# Altium PCB KC_Input_VAS_v0.21.PcbDoc
Units mil, origin at the board's own origin, x right, y up, seen from the top; angles counter-clockwise.
Board outline 3260 x 1710 mil, 2 copper layers (Top Layer, Bottom Layer); 49 components, 32 nets, 108 pads, 0 vias.
Unrouted connection lines stored in the file: 1.
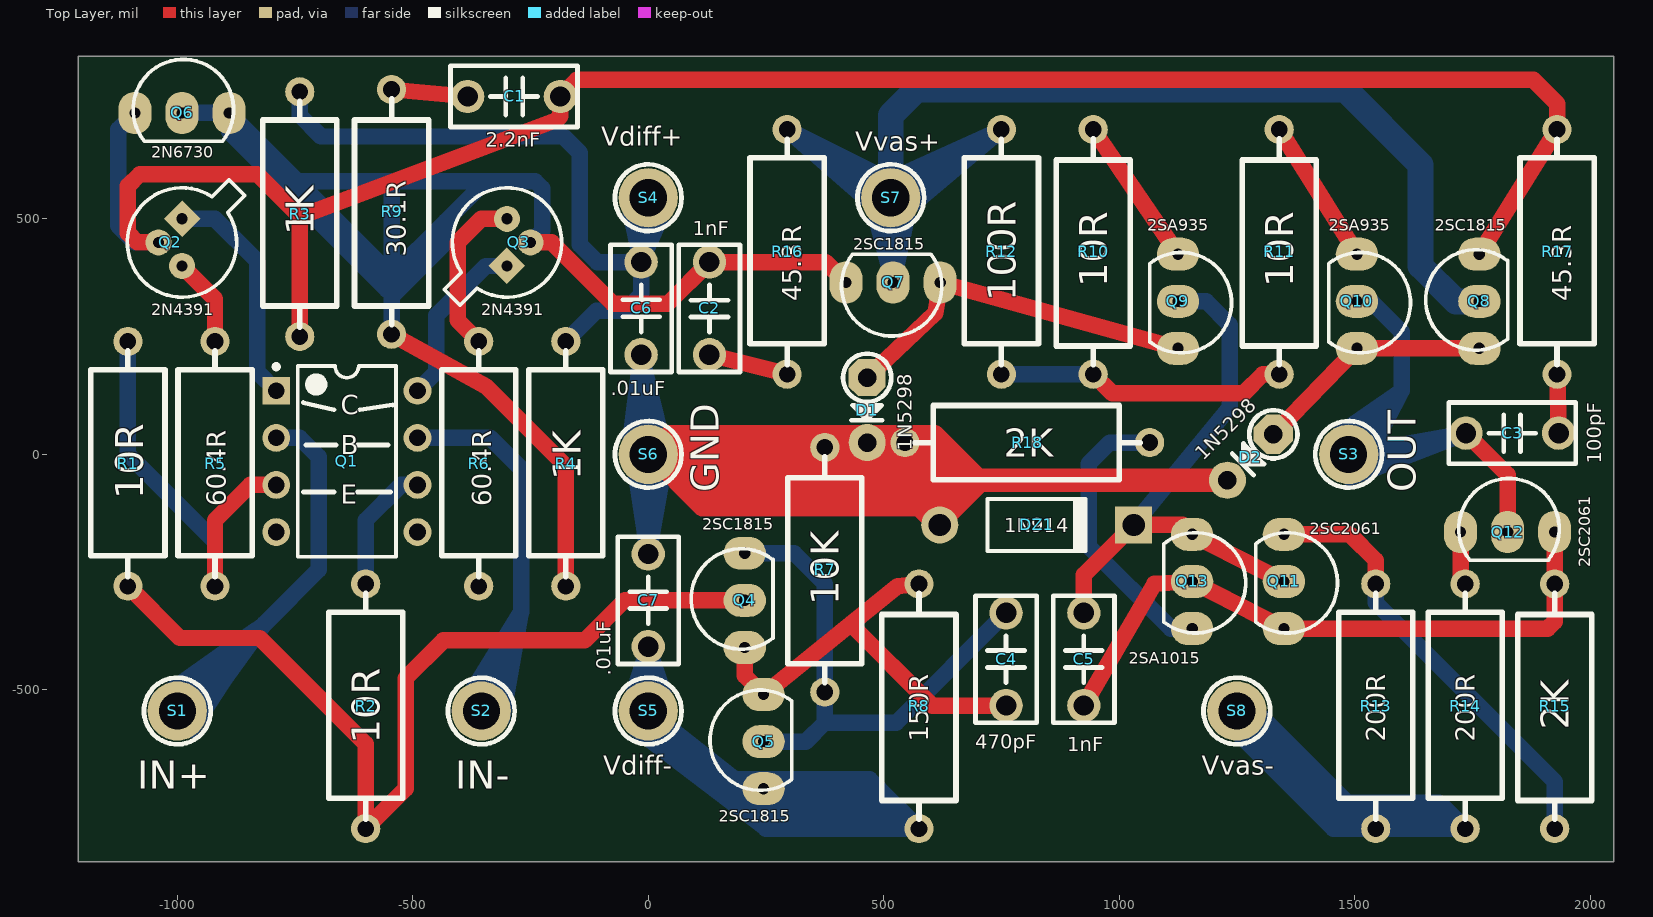
[diagram p0: Top Layer view]
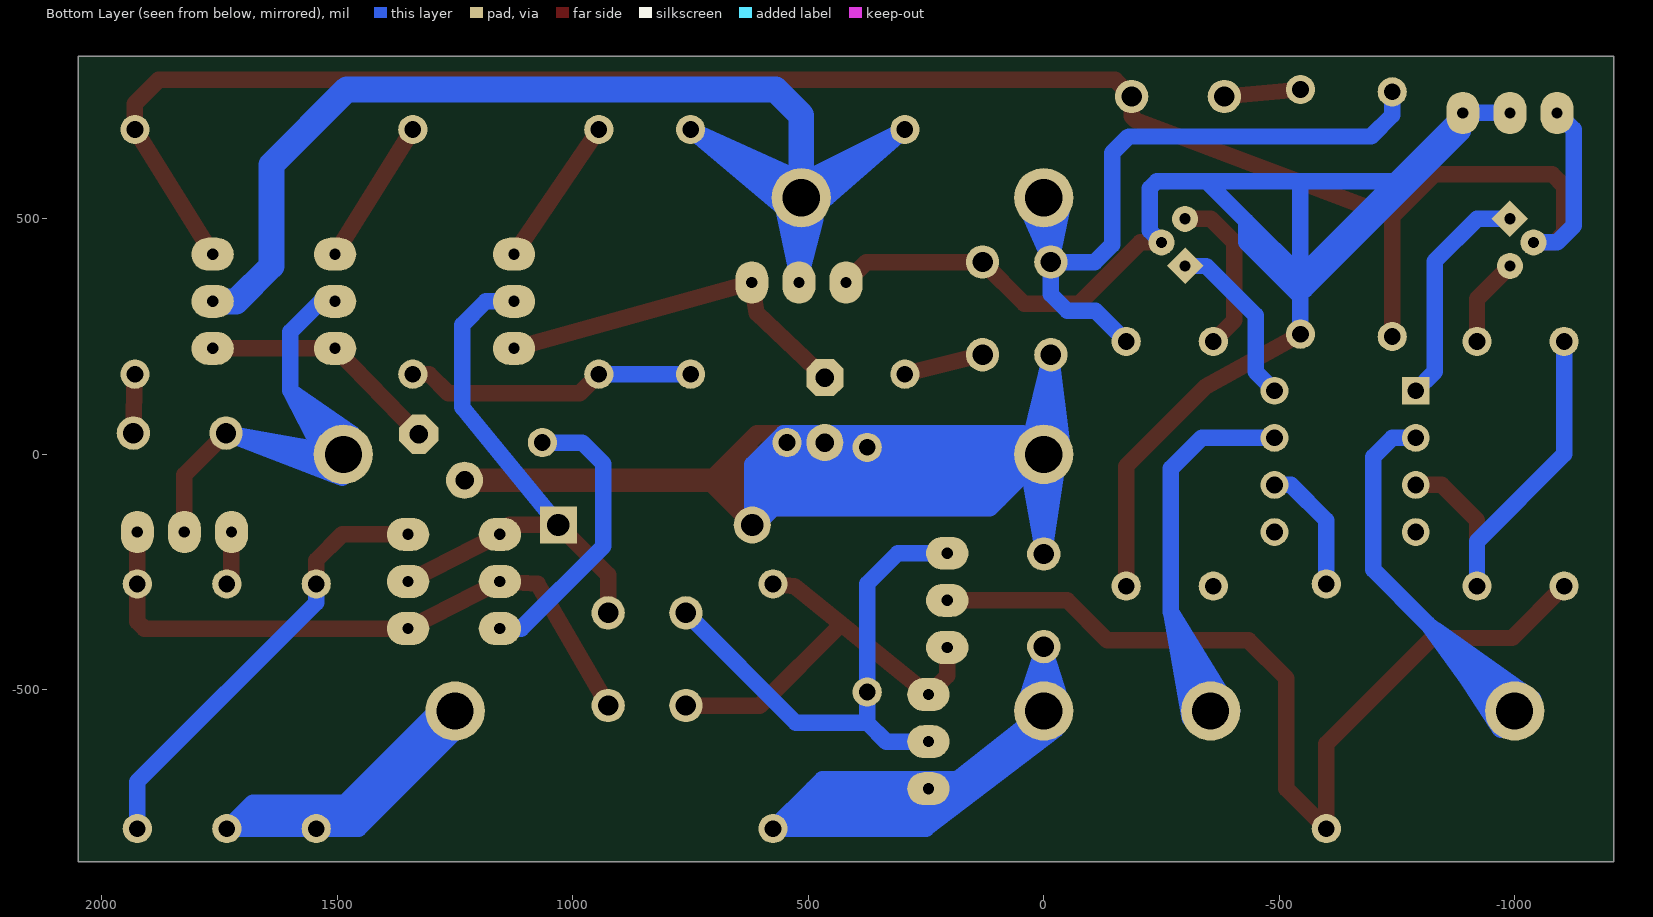
[diagram p1: Bottom Layer view, seen from below]

## Layer stack, top to bottom
Top Solder: solder mask 0.4, Solder Resist, Dk 3.5
Top Layer: signal copper 1.4
Dielectric 1: dielectric 12.6, FR-4, Dk 4.8
Bottom Layer: signal copper 1.4
Bottom Solder: solder mask 0.4, Solder Resist, Dk 3.5

## Board outline
-1210,-865 2050,-865 2050,845 -1210,845

## Design rules (kind name [scope] priority, off if disabled: settings)
Clearance [All] p1: gap=10 ignorepadtopadclearanceinfootprint=FALSE except(0: Arc-Hole Track-Hole SMDPad-Hole THPad-Hole Via-Hole Fill-Hole Poly-Hole Region-Hole Text-Hole)
PolygonConnect [All] p1: connectstyle=Relief reliefconductorwidth=10 reliefentries=4 polygonreliefangle="90 Angle" airgapwidth=10
RoomDefinition KC_Input_VAS_Schematic_v0.21 [InComponentClass('KC_Input_VAS_Schematic_v0.21')] p1: confinementstyle=ConfineIn formatcopy=TRUE lockcomponents=FALSE outline -3867.5,-3160 -1867.5,-3160 -1867.5,-2160 -3867.5,-2160
RoutingVias [All] p1: holewidth=28 width=50 viastyle="Through Hole" minholewidth=28 minwidth=50 maxholewidth=28 maxwidth=50
SolderMaskExpansion [All] p1: expansion=4
Width [All] p1: maxlimit=100 minlimit=10 preferedwidth=35
30 further rules are at their usual default settings.

## Components (designator, comment, footprint, x,y, rotation, side; value= is the part's Value field where it differs from the comment)
C1 "2.2nF" "CBB 6.3*6.3*5" -285,760 r180 top
C2 "1nF" "CBB 6.3*6.3*5" 130,310 r90 top
C3 "100pF" "CBB 6.3*6.3*5" 1835,45 r0 top
C4 "470pF" "CBB 6.3*6.3*5" 760,-435 r270 top
C5 "1nF" "CBB 6.3*6.3*5" 925,-435 r270 top
C6 ".01uF" "CBB 6.3*6.3*5" -15,310 r270 top
C7 ".01uF" "CBB 6.3*6.3*5" 0,-310 r270 top
D1 "1N5298" DO-41V 465,162.8 r270 top
D2 "1N5298" DO-41V 1327.44,42.44 r225 top
DZ1 "1N914" DO-41 825,-150 r0 top
Q1 "MAT-02" DIP-8 -640,-15 r0 top
Q2 "2N4391" TO-18_SMALLHOLE -990,450 r270 top
Q3 "2N4391" TO-18_SMALLHOLE -300,450 r90 top
Q4 "2SC1815" TO92A_SmallHole 205,-410 r180 top
Q5 "2SC1815" TO92A_SmallHole 245,-710 r180 top
Q6 "2N6730" TO92A_SmallHole -1090,725 r90 top
Q7 "2SC1815" TO92A_SmallHole 620,365 r270 top
Q8 "2SC1815" TO92A_SmallHole 1765,225 r180 top
Q9 "2SA935" TO92A_SmallHole 1125,425 r0 top
Q10 "2SA935" TO92A_SmallHole 1505,425 r0 top
Q11 "2SC2061" TO92A_SmallHole 1350,-170 r0 top
Q12 "2SC2061" TO92A_SmallHole 1725,-165 r90 top
Q13 "2SA1015" TO92A_SmallHole 1155,-170 r0 top
R1 "10R" "RS 1/2W-L" -1105,-20 r90 top
R2 "10R" "RS 1/2W-L" -600,-535 r90 top
R3 "1K" "RS 1/2W-L" -740,510 r90 top
R4 "1K" "RS 1/2W-L" -175,-20 r90 top
R5 "60.4R" "RS 1/2W-L" -920,-20 r90 top
R6 "60.4R" "RS 1/2W-L" -360,-20 r90 top
R7 "10K" "RS 1/2W-L" 375,-245 r270 top
R8 "150R" "RS 1/2W-L" 575,-535 r270 top
R9 "30.1R" "RS 1/2W-L" -545,515 r270 top
R10 "10R" "RS 1/2W-L" 945,430 r270 top
R11 "10R" "RS 1/2W-L" 1340,430 r270 top
R12 "100R" "RS 1/2W-L" 750,430 r90 top
R13 "200R" "RS 1/2W-L" 1545,-535 r90 top
R14 "200R" "RS 1/2W-L" 1735,-535 r90 top
R15 "2K" "RS 1/2W-L" 1925,-535 r270 top
R16 "45.3R" "RS 1/2W-L" 295,430 r90 top
R17 "45.3R" "RS 1/2W-L" 1930,430 r90 top
R18 "2K" "RS 1/2W-L" 805,25 r180 top
S1 "IN+" Screw-M2-XS -1000,-545 r0 top
S2 "IN-" Screw-M2-XS -354.5,-545 r0 top
S3 "OUT" Screw-M2-XS 1487.5,0 r0 top
S4 "Vdiff+" Screw-M2-XS 0,545 r0 top
S5 "Vdiff-" Screw-M2-XS 0,-545 r0 top
S6 "GND" Screw-M2-XS 0,0 r0 top
S7 "Vvas+" Screw-M2-XS 515,545 r0 top
S8 "Vvas-" Screw-M2-XS 1250,-545 r0 top

## Footprints (in the part's own frame and the unit in brackets; to place one, negate y for a bottom-side part, rotate by r counter-clockwise, add the part's x,y. Pads: shape width x height; smd on the part's side, far side on the other; paste and mask are expansions set on the pad)
"CBB 6.3*6.3*5" [mm] "脚距5mm高6.3mm厚3mm"
  round 1.8 hole 1.1: 1(-2.5,0) 2(2.5,0)
  silkscreen extent -3.43,-1.65 3.43,1.65, body extent -3.15,-1.5 3.15,1.5, height 6.8
DIP-8 [mm] "DIP; 8 Leads; Row Spacing 7.62 mm; Pitch 2.54 mm"
  rect 1.5x1.5 hole 0.9: 1(-3.81,3.81)
  round 1.5 hole 0.9: 2(-3.81,1.27) 3(-3.81,-1.27) 4(-3.81,-3.81) 5(3.81,-3.81) 6(3.81,-1.27) 7(3.81,1.27) 8(3.81,3.81)
  silkscreen extent -3.93,-5.15 2.65,5.23, body extent -3.6,-5.15 3.6,5.15, height 5.08
DO-41 [mm] "Diode, Axial; Body 5.2 x 2.7 mm (LxDia. max), Lead Dia. 0.86 mm (max)"
  round 2 hole 1.2: 1(-5.23,0)
  rect 2x2 hole 1.2: 2(5.23,0)
  silkscreen extent -2.65,-1.4 2.75,1.4
DO-41V [mm] "2.6*3.5mm(直径，脚距）"
  oct 2x2 hole 1: 1(0,0)
  round 2 hole 1: 2(3.5,0)
  silkscreen extent -1.3,-1.3 2.3,1.3, body extent -1.3,-1.3 3.9,1.3, height 6.9
"RS 1/2W-L" [mil] "直插色环电阻，脚距12.5mm，直径3mm"
  round 62 hole 35.43: 1(-259.84,0) 2(259.84,0)
  silkscreen extent -240,-79 239,79, body extent -256,-59 256,59, height 122
Screw-M2-XS [mm]
  round 3.2 hole 2: 1(0,0)
  silkscreen extent -1.8,-1.8 1.8,1.8
TO92A_SmallHole [mil]
  oval 90x70 hole 24.02: 1(0,0) 2(0,-100) 3(0,-200)
  silkscreen extent -60,-209 114,4
TO-18_SMALLHOLE [mm] "Can; 3 Leads; Pin Circle Dia. 2.54 mm; Lead Dia. 0.48 mm (max)"
  rect 1.4x1.4 hole 0.61 rot 45: 1(-1.27,0)
  round 1.4 hole 0.61: 2(0,-1.27) 3(1.27,0)
  silkscreen extent -3.39,-2.95 2.95,3.39

## Part data
C1 C2 C3 C4 C5 C6 C7: library part C-CBB, "CBB电容", BOM名称=CBB电容, 学习资源=www.ooocke.com, 版权归属=源创客
D1 D2: library part 1N5xxx, "Current Regulator Diodes"
DZ1: library part 1N4619, "3V/0.5W稳压管", BOM名称=3V/0.5W稳压管, 学习资源=www.ooocke.com, 版权归属=源创客
Q1: "孪生对管-NPN型 40V/20ma"
Q2 Q3: "N沟道JFET开关管 40V/150ma"
Q4 Q5 Q7 Q8: "音频放大-NPN型"
Q6: library part 2N6728/6729/6730, "中功率放大-PNP型"
Q9 Q10: "音频功放-PNP型 50V/500ma"
Q11 Q12: "音频放大-NPN型 50V/500ma"
Q13: "音频放大-PNP型"
R1 R2 R3 R4 R5 R6 R7 R8 R9 R10 R11 R12 R13 R14 R15 R16 R17 R18: library part R-CRR, "直插色环电阻", BOM名称=色环电阻, 学习资源=www.ooocke.com, 版权归属=源创客
S1 S2 S3 S4 S5 S6 S7 S8: library part ScrewConnector, "Screw Connector"

## Nets (pads, with @x,y where several pads share a name; then routed paths per layer and width w, separated by ;. In a path a pad name is that pad's centre, name@x,y a point inside that pad or via, vN(x,y) a via of type N, cw(c..) or ccw(c..) an arc to the next point about the centre after c; other vN are vias at no path point)
GND: C6.2 C7.1 D1.2 D2.2 DZ1.1 R7.1 R18.2 S6.1 | length 11987.3
  Top Layer w35: R18.2@550,45 R18.2@525.16,45 ; S6.1 465,0 535,0 R18.2@540,-5 ; S6.1 S6.1@14.84,14.84 ; S6.1 115,-115 575,-115 610,-150 DZ1.1 ; S6.1@14.84,14.84 45,45 R18.2@525.16,45 ; S6.1@14.84,14.84 R7.1 385.16,25 D1.2 R18.2 ; 525,-40 545,-40 ; 525,-40 105,-40 105,-45 125,-65 535,-65 535,-50 525,-40 ; 525,-40 505,-20 55,-20 125,-90 560,-90 560,-40 ; R18.2@525.16,45 R18.2 ; R18.2@540,-5 540,19.84 R18.2 ; R18.2@540,-5 540,-35 545,-35 545,-40 ; R18.2@540,-5 560,-25 560,-40 ; 545,-40 560,-40 ; R18.2 590,-19.84 590,-55 ; R18.2 555,34.84 R18.2@555,45 ; R18.2@555,45 600,0 ; R18.2@555,45 605.91,45 ; 590,-55 590,-120.91 DZ1.1 ; 590,-55 619.09,-55 ; 600,0 619.09,-19.09 619.09,-49.09 ; 600,0 625,0 655,-30 ; 605.91,45 610,45 710,-55 ; 605.91,45 705.91,-55 ; DZ1.1 619.09,-100 ; DZ1.1 710,-59.09 ; 619.09,-100 640,-100 ; 619.09,-100 619.09,-79.09 ; 619.09,-79.09 619.09,-55 ; 619.09,-79.09 640,-100 ; 619.09,-55 625,-55 ; 619.09,-55 619.09,-49.09 ; 619.09,-49.09 638.19,-30 655,-30 ; 619.09,-49.09 625,-55 ; 625,-55 680,-55 ; 625,-55 655,-85 ; 640,-100 655,-85 ; 655,-85 680.91,-59.09 684.09,-59.09 ; 655,-30 680,-55 ; 680,-55 684.09,-59.09 ; 680,-55 705.91,-55 ; 684.09,-59.09 710,-59.09 ; 705.91,-55 710,-55 ; 705.91,-55 710,-59.09 ; 710,-59.09 710,-55
  Top Layer w50: 710,-55 D2.2
  Bottom Layer w35: S6.1@-40,10 C6.2 ; S6.1@-30,-15 C7.1 ; S6.1@35,-20 S6.1@32.68,-32.68 ; S6.1@35,5 34.21,8.28 S6.1@32.62,14.84 ; S6.1@55,-20 72.5,-37.5 ; C6.2 S6.1@29.15,29.15 ; C6.2 S6.1 ; C7.1 S6.1@32.68,-32.68 ; C7.1 S6.1 ; S6.1 S6.1@14.84,14.84 ; S6.1 R7.1@360.16,0 ; S6.1 S6.1@32.68,-32.68 ; S6.1@14.84,14.84 S6.1@29.15,29.15 ; S6.1@14.84,14.84 S6.1@32.62,14.84 ; S6.1@29.15,29.15 S6.1@32.62,14.84 ; S6.1@29.15,29.15 45,45 465,45 553.19,45 619.09,-20.91 619.09,-48.94 ; S6.1@32.62,14.84 R7.1 ; S6.1@32.68,-32.68 95,-95 ; 72.5,-37.5 100,-65 569.09,-65 584.09,-80 ; 72.5,-37.5 80,-30 555,-30 ; 95,-95 115,-115 575,-115 ; 95,-95 555,-95 575,-115 ; R7.1@360.16,0 465,0 525,0 555,-30 ; R7.1@360.16,0 R7.1 ; R7.1 454.84,14.84 D1.2 R18.2 619.09,-48.94 ; 555,-30 584.09,-59.09 584.09,-80 ; 575,-115 584.09,-115 ; 575,-115 610,-150 DZ1.1 ; 584.09,-115 584.09,-80 ; 584.09,-115 DZ1.1 ; DZ1.1 619.09,-48.94
NetC1_1: C1.1 Q2.2 Q6.1 Q8.3 R3.1 R17.2 | length 4349.5
  Top Layer w35: Q2.2 -1085,450 -1105,470 -1105,570 -1080,595 -830,595 -740,505 ; R3.1 -740,505 ; Q8.3 R17.2 1930,745 1880,795 -151.57,795 C1.1 -186.57,718.43 -195,710 -740,505
  Bottom Layer w35: Q6.1 -1125,690 -1125,485 -1090,450 Q2.2
NetC1_2: C1.2 R9.1 | length 162.3
  Top Layer w35: R9.1 C1.2
NetC2_1: C2.1 R16.1 | length 170.1
  Top Layer w35: C2.1 R16.1
NetC2_2: C2.2 Q3.2 Q6.2 Q6.3 Q7.3 R4.1 R9.2 | length 4070.6
  Top Layer w35: R9.2 -345,145 -175,-25 R4.1 ; Q3.2 -205,450 -75,320 41.57,320 C2.2 376.57,408.43 Q7.3
  Bottom Layer w35: Q6.2 Q6.3 ; -555,350 -890,685 Q6.3 ; R9.2 -545,335 ; Q3.2 -225,475 -225,565 -240,580 -345,580 ; Q6.3 -745,580 ; -745,580 -545,580 ; -745,580 -545,380 ; -545,335 -545,380 ; -545,335 -430,450 -430,495 ; -545,380 -430,495 ; -545,380 -545,580 ; -545,580 -345,580 ; -430,495 -345,580
NetC3_1: C3.1 Q10.2 Q12.2 S3.1 | length 1738.3
  Top Layer w35: C3.1 1825,-43.43 Q12.2
  Bottom Layer w35: S3.1@1470,45 1600,135 ; S3.1@1490,-50 1504.6,-44.38 C3.1 ; Q10.2 1535,325 1600,260 1600,135 ; S3.1@1515,-35 C3.1 ; S3.1@1530,0 S3.1@1534.39,8.47 ; S3.1@1534.39,8.47 1600,135 ; S3.1@1534.39,8.47 C3.1 ; S3.1@1534.39,8.47 S3.1 1487.5,22.5 1600,135
NetC3_2: C3.2 R17.1 | length 125.2
  Top Layer w35: R17.1 C3.2
NetC4_1: C4.1 Q4.3 Q5.2 R7.2 | length 1120.2
  Bottom Layer w35: Q4.3 310,-210 375,-275 R7.2 375,-570 ; Q5.2 335,-610 375,-570 ; C4.1 526.57,-570 375,-570
NetC4_2: C4.2 Q4.1 Q5.3 R8.1 | length 929.6
  Top Layer w35: Q4.1 205,-470 Q5.3 430,-360.7 ; R8.1 530,-280 430,-360.7 ; C4.2 602.72,-533.43 430,-360.7
NetC5_1: C5.1 DZ1.2 Q9.2 Q11.2 Q13.1 | length 1210.4
  Top Layer w35: C5.1 925,-255.91 DZ1.2 1135,-150 Q13.1 Q11.2
  Bottom Layer w35: DZ1.2 1235,100 1235,275 1185,325 Q9.2
NetC5_2: C5.2 Q11.3 Q12.3 Q13.2 R15.1 | length 1369.3
  Top Layer w35: C5.2 1075,-275 Q13.2 Q11.3 1910,-370 1925,-355 R15.1 Q12.3
NetC6_1: C6.1 R3.2 R4.2 S4.1 | length 1719.3
  Bottom Layer w35: R3.2 -740,720 -695,675 -180,675 -145,640 -145,445 -108.43,408.43 C6.1 ; R4.2 -109.84,305 -50,305 -15,340 C6.1 ; S4.1@-45,550 -42.05,536.09 C6.1 ; S4.1 C6.1 ; S4.1@45,545 37.72,528.43 C6.1
NetC7_2: C7.2 Q5.1 R8.2 S5.1 | length 3599
  Bottom Layer w35: S5.1@-40,-535 -39.24,-532.6 C7.2 ; S5.1@-30,-580 -25.38,-583.08 165,-710 ; S5.1@-25,-585 249.84,-794.84 ; S5.1@40.59,-531.63 S5.1@45,-545 ; S5.1@40.59,-531.62 C7.2 ; 180.69,-690 152.8,-690 150,-687.2 165,-710 ; 190,-695 S5.1 ; 190,-690 470.16,-690 490.16,-710 ; Q5.1@220,-740 475,-740 493.75,-758.75 ; 235,-770 242.5,-777.5 512.5,-777.5 ; 235,-760 236.25,-758.75 493.75,-758.75 ; S5.1 C7.2 ; S5.1 165,-710 ; 165,-710 249.84,-794.84 ; 165,-710 Q5.1 490.16,-710 ; 249.84,-794.84 529.84,-794.84 ; 490.16,-710 R8.2 529.84,-794.84 ; 493.75,-758.75 512.5,-777.5 ; 512.5,-777.5 529.84,-794.84
NetD1_2: D1.1 Q7.1 Q9.3 | length 789.4
  Top Layer w35: D1.1 610,300 Q7.1 Q9.3
NetD2_2: D2.1 Q8.1 Q10.3 | length 514.7
  Top Layer w35: D2.1 Q10.3 Q8.1
NetQ1_1: Q1.1 Q2.1 | length 488.8
  Bottom Layer w35: Q2.1 -920,500 -830,410 -830,175 Q1.1
NetQ1_2: Q1.2 S1.1 | length 1722.2
  Bottom Layer w35: S1.1@-1040,-520 -1025.11,-509.48 -831.7,-372.77 ; S1.1 -839.06,-384.06 ; S1.1@-985,-490 -831.7,-372.77 ; S1.1@-970,-585 -960.65,-570.65 -893.31,-467.32 ; S1.1@-950,-545 -893.31,-467.32 ; Q1.2 -740,35 -700,-5 -700,-245 -815,-360 ; -893.31,-467.32 -815,-360 ; -893.31,-467.32 -839.06,-384.06 ; -839.06,-384.06 -815,-360 ; -839.06,-384.06 -831.7,-372.77 ; -831.7,-372.77 -815,-360
NetQ1_3: Q1.3 R1.2 R5.1 | length 897.2
  Top Layer w35: R5.1 -920,-140 -845,-65 Q1.3
  Bottom Layer w35: R1.2 -1105,0 -920,-185 R5.1
NetQ1_5: Q1.6 R2.2 R6.1 | length 276.2
  Bottom Layer w35: R2.2 -600,-140 -525,-65 Q1.6
NetQ1_6: Q1.7 S2.1 | length 1686.9
  Bottom Layer w35: Q1.7 -335,35 -270,-30 -270,-335 ; S2.1@-400,-545 -387.39,-524.64 -270,-335 ; S2.1@-385,-525 -270,-335 ; S2.1 -270,-335 ; S2.1@-320,-540 -270,-335 ; S2.1@-310,-560 -308.78,-553.13 -270,-335
NetQ1_7: Q1.8 Q3.1 | length 370.1
  Bottom Layer w35: Q1.8 -450,175 -450,295 -345,400 Q3.1
NetQ2_2: Q2.3 R5.2 | length 189.2
  Top Layer w35: Q2.3 -920,330 R5.2
NetQ3_2: Q3.3 R6.2 | length 354.5
  Top Layer w35: R6.2 -405,284.84 -405,450 -355,500 Q3.3
NetQ4_2: Q4.2 R1.1 R2.1 | length 1967.1
  Top Layer w35: R1.1 -994.84,-390 -825,-390 -600,-615 R2.1 -515,-709.84 -515,-475 -435,-395 -135,-395 -50,-310 Q4.2
NetQ7_2: Q7.2 Q8.2 R12.2 R16.2 S7.1 | length 3707.2
  Bottom Layer w35: S7.1@460,545 R16.2 ; S7.1@485,500 Q7.2 ; S7.1@495,590 R16.2 ; S7.1@530,590 R12.2 ; S7.1@550,510 Q7.2 ; S7.1@555,525 R12.2 ; R16.2 S7.1 ; S7.1 Q7.2 ; S7.1 R12.2
  Bottom Layer w55: S7.1 515,720 570,775 1480,775 1640,615 1640,400 1715,325 Q8.2
NetQ9_1: Q9.1 R10.1 | length 320.2
  Top Layer w35: R10.1 Q9.1
NetQ10_1: Q10.1 R11.1 | length 312
  Top Layer w35: R11.1 Q10.1
NetQ11_1: Q11.1 R13.2 R15.2 | length 945
  Top Layer w35: Q11.1 1490,-170 1545,-225 R13.2
  Bottom Layer w35: R13.2 1545,-315 1925,-695 R15.2
NetQ12_1: Q12.1 R14.2 | length 114.3
  Top Layer w35: Q12.1 1725,-265.16 R14.2
NetQ13_3: Q13.3 R18.1 | length 616
  Bottom Layer w35: R18.1 980,25 935,-20 935,-195 1110,-370 Q13.3
NetR10_2: R10.2 R11.2 R12.1 | length 623.3
  Top Layer w35: R10.2 985.16,130 1265,130 1305.16,170.16 R11.2
  Bottom Layer w35: R12.1 R10.2
NetR13_1: R13.1 R14.1 S8.1 | length 1829.4
  Bottom Layer w35: S8.1 1290,-545 1485,-740 ; S8.1 1250,-590 1454.84,-794.84 1499.84,-794.84 ; S8.1 1499.84,-794.84 ; 1485,-740 1510,-765 ; 1485,-740 1680.16,-740 1705.16,-765 ; 1499.84,-794.84 R13.1@1539.84,-794.84 ; 1510,-765 1705.16,-765 ; 1510,-765 R13.1@1539.84,-794.84 ; R13.1@1539.84,-794.84 R13.1 R14.1 1705.16,-765
pads on no net: Q1.4 Q1.5

## Silkscreen, mask and mechanical layers (free items; w line width, h text height)
Top Overlay:
  lines w10: -732.5,-80 -667.5,-80 ; -732.5,110 -667.5,95 ; -727.5,20 -662.5,20 ; -617.5,-80 -547.5,-80 ; -617.5,20 -552.5,20 ; -612.5,95 -542.5,105
  text "C" at -652.5,85 h40
  text "B" at -652.5,0 h40
  text "E" at -652.5,-105 h40
Mechanical 1:
  the board outline again, w10
Drill Drawing:
  the board outline again, w10